# EAGLE board CT_Adapter_MOD4ELECROW (EAGLE 6.5.0)
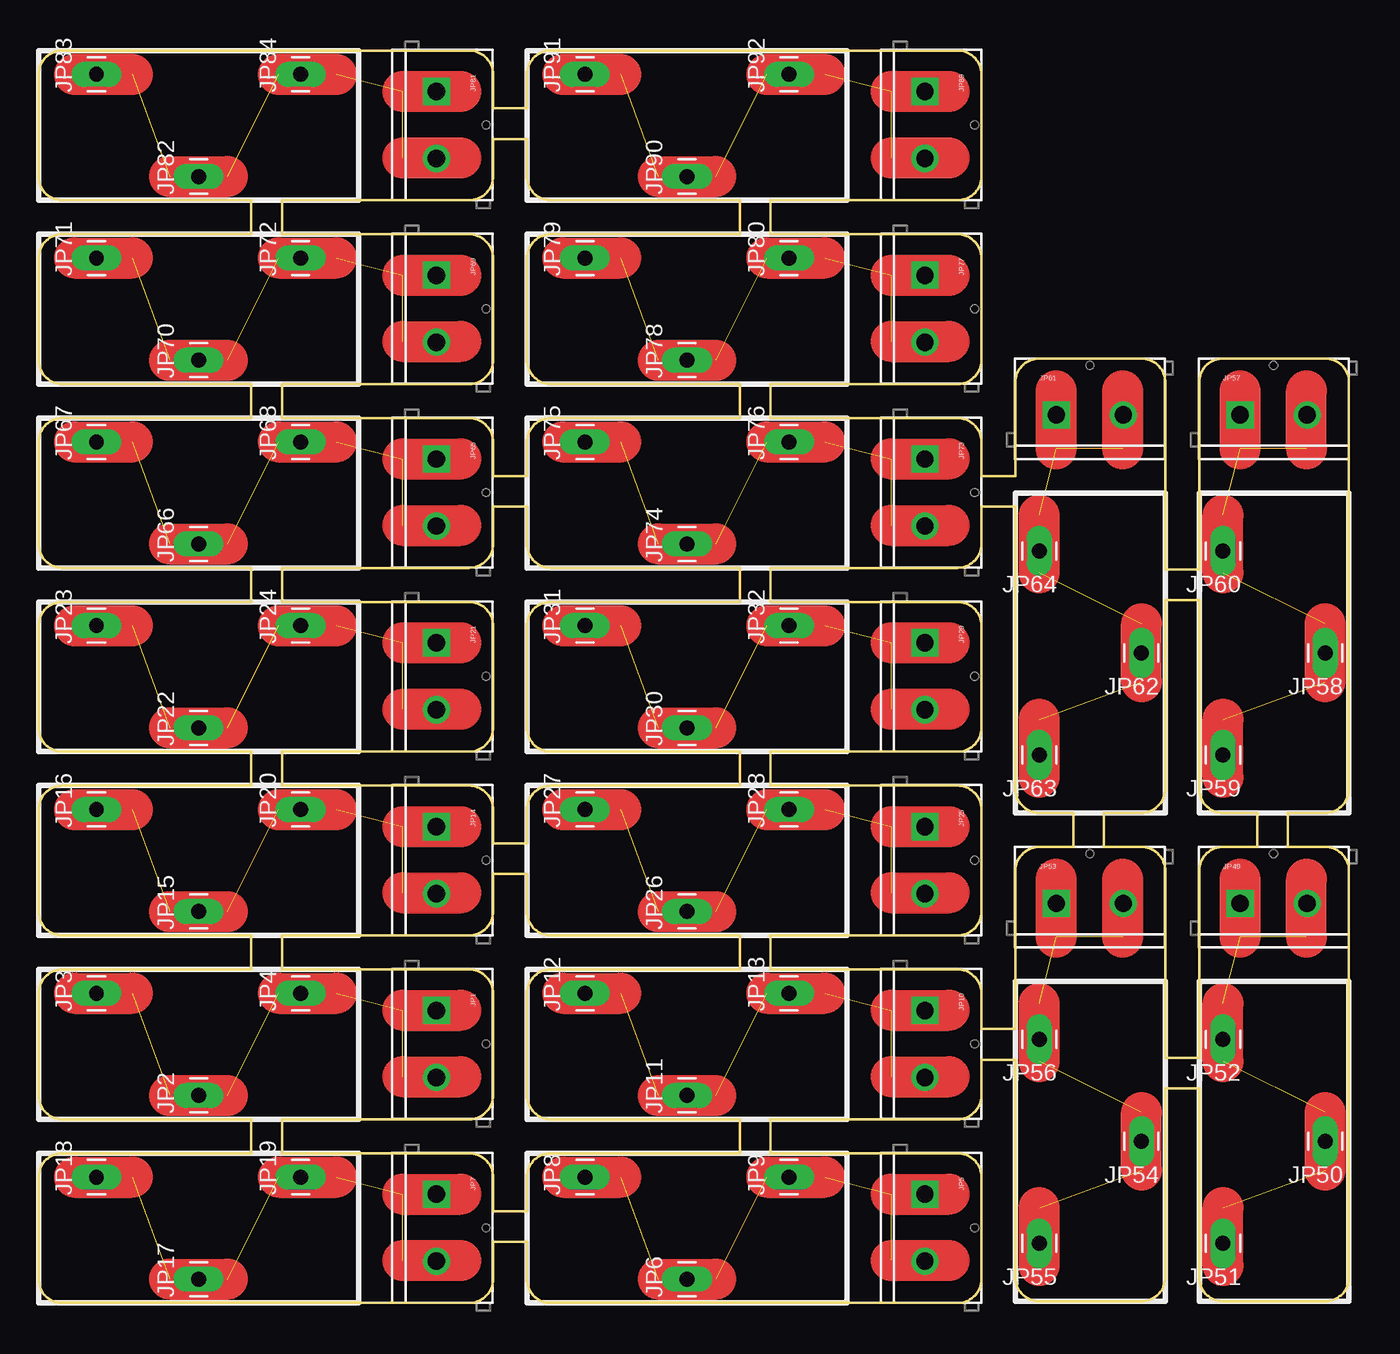
[diagram p0: board, top side]
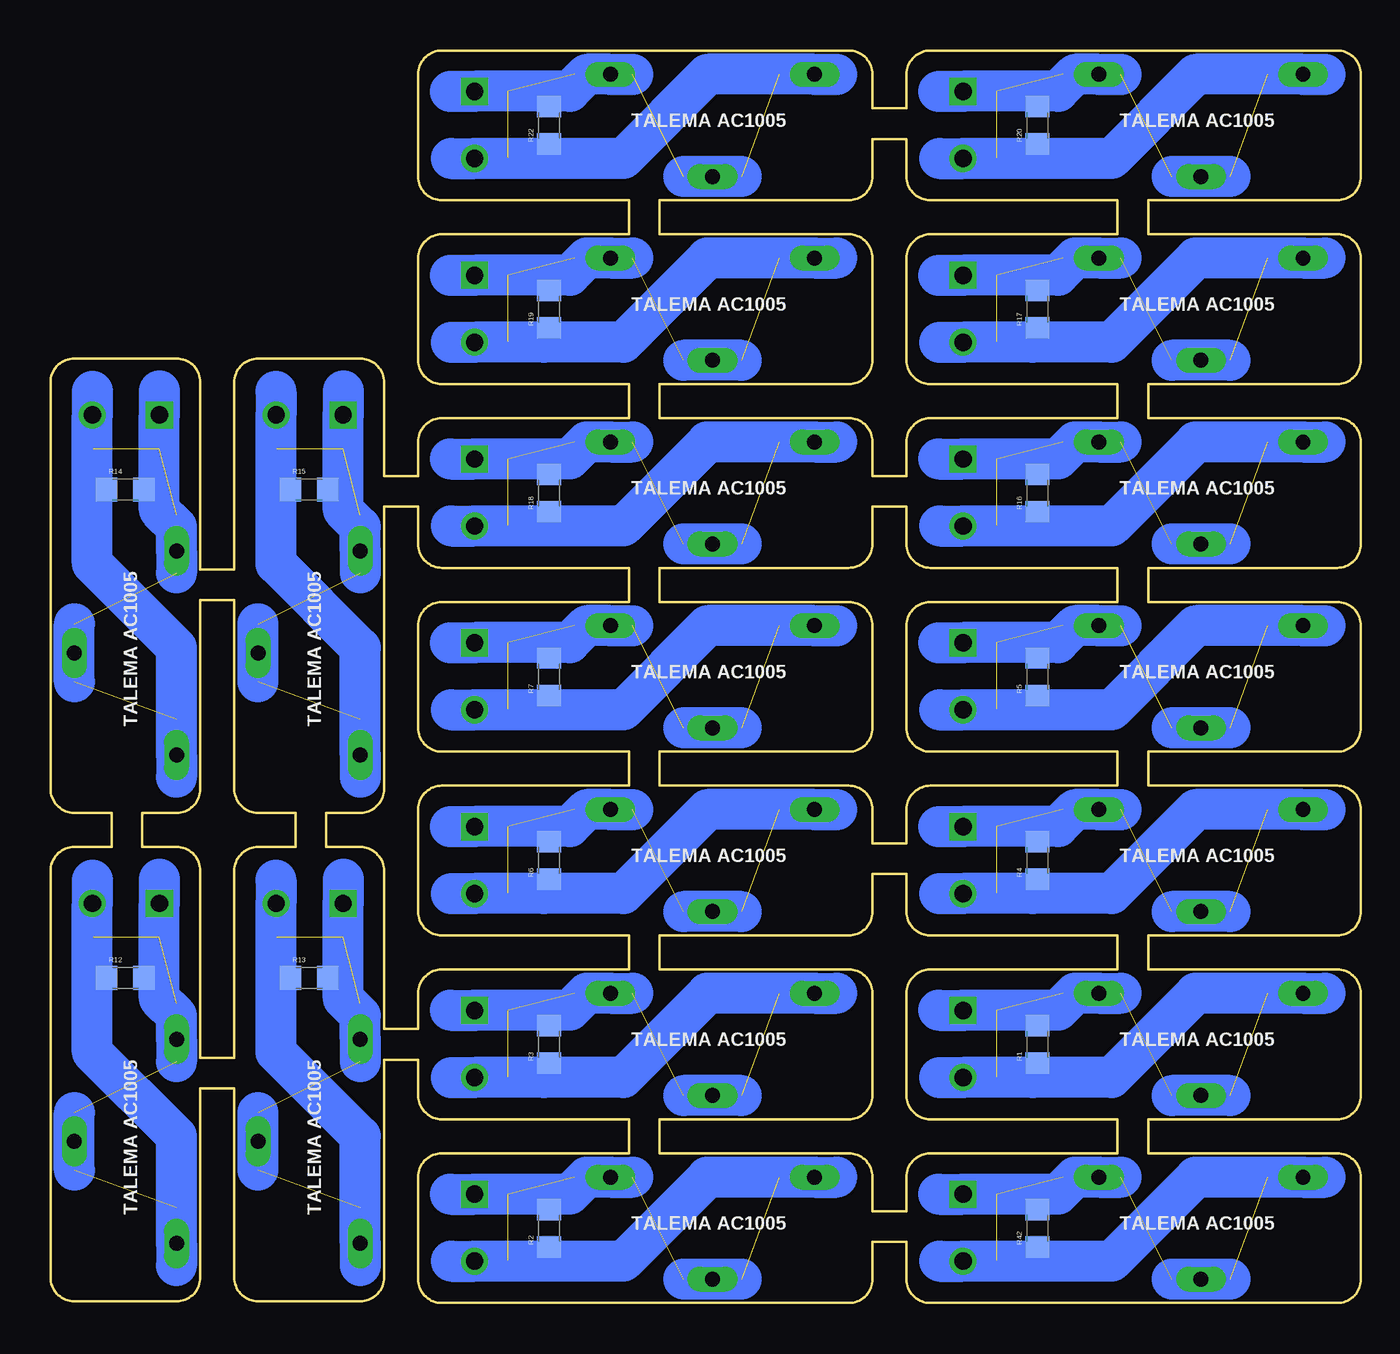
[diagram p1: board, bottom side, seen from below]

Size 97.79 x 93.47 mm. Coordinates in mm from the lower left corner, seen from the top.
Outline: 0,1.78 0,9.4 arc-90 1.78,11.18 15.88,11.18 15.88,13.72 1.78,13.72 arc-90 0,15.49 0,23.11 arc-90 1.78,24.89 15.88,24.89 15.88,27.43 1.78,27.43 arc-90 0,29.21 0,36.83 arc-90 1.78,38.61 15.88,38.61 15.88,41.15 1.78,41.15 arc-90 0,42.93 0,50.55 arc-90 1.78,52.32 15.88,52.32 15.88,54.86 1.78,54.86 arc-90 0,56.64 0,64.26 arc-90 1.78,66.04 15.88,66.04 15.88,68.58 1.78,68.58 arc-90 0,70.36 0,77.98 arc-90 1.78,79.76 15.88,79.76 15.88,82.3 1.78,82.3 arc-90 0,84.07 0,91.69 arc-90 1.78,93.47 32.13,93.47 arc-90 33.91,91.69 33.91,89.15 36.45,89.15 36.45,91.69 arc-90 38.23,93.47 68.58,93.47 arc-90 70.36,91.69 70.36,84.07 arc-90 68.58,82.3 54.61,82.3 54.61,79.76 68.58,79.76 arc-90 70.36,77.98 70.36,70.36 arc-90 68.58,68.58 54.61,68.58 54.61,66.04 68.58,66.04 arc-90 70.36,64.26 70.36,61.72 72.9,61.72 72.9,68.71 arc-90 74.68,70.48 82.3,70.48 arc-90 84.07,68.71 84.07,54.74 86.61,54.74 86.61,68.71 arc-90 88.39,70.48 96.01,70.48 arc-90 97.79,68.71 97.79,38.35 arc-90 96.01,36.58 93.22,36.58 93.22,34.04 96.01,34.04 arc-90 97.79,32.26 97.79,1.91 arc-90 96.01,0.13 88.39,0.13 arc-90 86.61,1.91 86.61,16 84.07,16 84.07,1.91 arc-90 82.3,0.13 74.68,0.13 arc-90 72.9,1.91 72.9,18.16 70.36,18.16 70.36,15.49 arc-90 68.58,13.72 54.61,13.72 54.61,11.18 68.58,11.18 arc-90 70.36,9.4 70.36,1.78 arc-90 68.58,0 38.23,0 arc-90 36.45,1.78 36.45,4.57 33.91,4.57 33.91,1.78 arc-90 32.13,0 1.78,0 arc-90 0,1.78
Outline: 33.91,9.4 33.91,6.86 36.45,6.86 36.45,9.4 arc-90 38.23,11.18 52.32,11.18 52.32,13.72 38.23,13.72 arc-90 36.45,15.49 36.45,23.11 arc-90 38.23,24.89 52.32,24.89 52.32,27.43 38.23,27.43 arc-90 36.45,29.21 36.45,32 33.91,32 33.91,29.21 arc-90 32.13,27.43 18.16,27.43 18.16,24.89 32.13,24.89 arc-90 33.91,23.11 33.91,15.49 arc-90 32.13,13.72 18.16,13.72 18.16,11.18 32.13,11.18 arc-90 33.91,9.4
Outline: 70.36,23.11 70.36,20.45 72.9,20.45 72.9,32.26 arc-90 74.68,34.04 77.22,34.04 77.22,36.58 74.68,36.58 arc-90 72.9,38.35 72.9,59.44 70.36,59.44 70.36,56.64 arc-90 68.58,54.86 54.61,54.86 54.61,52.32 68.58,52.32 arc-90 70.36,50.55 70.36,42.93 arc-90 68.58,41.15 54.61,41.15 54.61,38.61 68.58,38.61 arc-90 70.36,36.83 70.36,29.21 arc-90 68.58,27.43 54.61,27.43 54.61,24.89 68.58,24.89 arc-90 70.36,23.11
Outline: 33.91,36.83 33.91,34.29 36.45,34.29 36.45,36.83 arc-90 38.23,38.61 52.32,38.61 52.32,41.15 38.23,41.15 arc-90 36.45,42.93 36.45,50.55 arc-90 38.23,52.32 52.32,52.32 52.32,54.86 38.23,54.86 arc-90 36.45,56.64 36.45,59.44 33.91,59.44 33.91,56.64 arc-90 32.13,54.86 18.16,54.86 18.16,52.32 32.13,52.32 arc-90 33.91,50.55 33.91,42.93 arc-90 32.13,41.15 18.16,41.15 18.16,38.61 32.13,38.61 arc-90 33.91,36.83
Outline: 88.39,34.04 90.93,34.04 90.93,36.58 88.39,36.58 arc-90 86.61,38.35 86.61,52.45 84.07,52.45 84.07,38.35 arc-90 82.3,36.58 79.5,36.58 79.5,34.04 82.3,34.04 arc-90 84.07,32.26 84.07,18.29 86.61,18.29 86.61,32.26 arc-90 88.39,34.04
Outline: 33.91,64.26 33.91,61.72 36.45,61.72 36.45,64.26 arc-90 38.23,66.04 52.32,66.04 52.32,68.58 38.23,68.58 arc-90 36.45,70.36 36.45,77.98 arc-90 38.23,79.76 52.32,79.76 52.32,82.3 38.23,82.3 arc-90 36.45,84.07 36.45,86.87 33.91,86.87 33.91,84.07 arc-90 32.13,82.3 18.16,82.3 18.16,79.76 32.13,79.76 arc-90 33.91,77.98 33.91,70.36 arc-90 32.13,68.58 18.16,68.58 18.16,66.04 32.13,66.04 arc-90 33.91,64.26
Copper layers (1*16): Top 0.035mm / dielectric 1.5mm / Bottom 0.035mm
Design rules "default *": minimum track width 10mil, minimum drill 24mil, track to track 8mil, track to pad 8mil, pad to pad 8mil, via to via 8mil, smd to smd 8mil, copper to edge 40mil, drill to drill 8mil, minimum pad ring 10mil, minimum via ring 8mil, stop-mask expansion 4mil, vias tented up to drill 0mil, thermal gap 10mil

## Footprints (pad centres in the part's own frame; a part is rotated, then mirrored left to right if it is on the bottom)
SCREWTERMINAL-5MM-2 = drill 1.3 pad 2.032 square: 1 0,0 | drill 1.3 pad 2.032: 2 5,0
1X01_LONGPAD = drill 1.118 pad 1.88 long: 1 0,0
1206 = smd 1.6 x 1.8: 1 -1.4,0; 2 1.4,0

## Placement (x,y rotation side)
JP1  [SCREWTERMINAL-5MM-2]  29.7,21.84 270 top
JP2  [1X01_LONGPAD]  11.94,15.49 90 top
JP3  [1X01_LONGPAD]  4.32,23.11 90 top
JP4  [1X01_LONGPAD]  19.56,23.11 90 top
JP5  [SCREWTERMINAL-5MM-2]  66.15,8.12 270 top
JP6  [1X01_LONGPAD]  48.39,1.78 90 top
JP7  [SCREWTERMINAL-5MM-2]  29.7,8.12 270 top
JP8  [1X01_LONGPAD]  40.77,9.4 90 top
JP9  [1X01_LONGPAD]  56.01,9.4 90 top
JP10  [SCREWTERMINAL-5MM-2]  66.15,21.84 270 top
JP11  [1X01_LONGPAD]  48.39,15.49 90 top
JP12  [1X01_LONGPAD]  40.77,23.11 90 top
JP13  [1X01_LONGPAD]  56.01,23.11 90 top
JP14  [SCREWTERMINAL-5MM-2]  29.7,35.55 270 top
JP15  [1X01_LONGPAD]  11.94,29.21 90 top
JP16  [1X01_LONGPAD]  4.32,36.83 90 top
JP17  [1X01_LONGPAD]  11.94,1.78 90 top
JP18  [1X01_LONGPAD]  4.32,9.4 90 top
JP19  [1X01_LONGPAD]  19.56,9.4 90 top
JP20  [1X01_LONGPAD]  19.56,36.83 90 top
JP21  [SCREWTERMINAL-5MM-2]  29.7,49.27 270 top
JP22  [1X01_LONGPAD]  11.94,42.93 90 top
JP23  [1X01_LONGPAD]  4.32,50.55 90 top
JP24  [1X01_LONGPAD]  19.56,50.55 90 top
JP25  [SCREWTERMINAL-5MM-2]  66.15,35.55 270 top
JP26  [1X01_LONGPAD]  48.39,29.21 90 top
JP27  [1X01_LONGPAD]  40.77,36.83 90 top
JP28  [1X01_LONGPAD]  56.01,36.83 90 top
JP29  [SCREWTERMINAL-5MM-2]  66.15,49.27 270 top
JP30  [1X01_LONGPAD]  48.39,42.93 90 top
JP31  [1X01_LONGPAD]  40.77,50.55 90 top
JP32  [1X01_LONGPAD]  56.01,50.55 90 top
JP49  [SCREWTERMINAL-5MM-2]  89.67,29.82 0 top
JP50  [1X01_LONGPAD]  96.01,12.06 180 top
JP51  [1X01_LONGPAD]  88.39,4.45 180 top
JP52  [1X01_LONGPAD]  88.39,19.68 180 top
JP53  [SCREWTERMINAL-5MM-2]  75.95,29.82 0 top
JP54  [1X01_LONGPAD]  82.3,12.06 180 top
JP55  [1X01_LONGPAD]  74.68,4.45 180 top
JP56  [1X01_LONGPAD]  74.68,19.68 180 top
JP57  [SCREWTERMINAL-5MM-2]  89.67,66.27 0 top
JP58  [1X01_LONGPAD]  96.01,48.51 180 top
JP59  [1X01_LONGPAD]  88.39,40.89 180 top
JP60  [1X01_LONGPAD]  88.39,56.13 180 top
JP61  [SCREWTERMINAL-5MM-2]  75.95,66.27 0 top
JP62  [1X01_LONGPAD]  82.3,48.51 180 top
JP63  [1X01_LONGPAD]  74.68,40.89 180 top
JP64  [1X01_LONGPAD]  74.68,56.13 180 top
JP65  [SCREWTERMINAL-5MM-2]  29.7,62.98 270 top
JP66  [1X01_LONGPAD]  11.94,56.64 90 top
JP67  [1X01_LONGPAD]  4.32,64.26 90 top
JP68  [1X01_LONGPAD]  19.56,64.26 90 top
JP69  [SCREWTERMINAL-5MM-2]  29.7,76.7 270 top
JP70  [1X01_LONGPAD]  11.94,70.36 90 top
JP71  [1X01_LONGPAD]  4.32,77.98 90 top
JP72  [1X01_LONGPAD]  19.56,77.98 90 top
JP73  [SCREWTERMINAL-5MM-2]  66.15,62.98 270 top
JP74  [1X01_LONGPAD]  48.39,56.64 90 top
JP75  [1X01_LONGPAD]  40.77,64.26 90 top
JP76  [1X01_LONGPAD]  56.01,64.26 90 top
JP77  [SCREWTERMINAL-5MM-2]  66.15,76.7 270 top
JP78  [1X01_LONGPAD]  48.39,70.36 90 top
JP79  [1X01_LONGPAD]  40.77,77.98 90 top
JP80  [1X01_LONGPAD]  56.01,77.98 90 top
JP81  [SCREWTERMINAL-5MM-2]  29.7,90.42 270 top
JP82  [1X01_LONGPAD]  11.94,84.07 90 top
JP83  [1X01_LONGPAD]  4.32,91.69 90 top
JP84  [1X01_LONGPAD]  19.56,91.69 90 top
JP89  [SCREWTERMINAL-5MM-2]  66.15,90.42 270 top
JP90  [1X01_LONGPAD]  48.39,84.07 90 top
JP91  [1X01_LONGPAD]  40.77,91.69 90 top
JP92  [1X01_LONGPAD]  56.01,91.69 90 top
R1  50ohm  [1206]  24.13,19.3 90 bottom
R2  50ohm  [1206]  60.58,5.59 90 bottom
R3  50ohm  [1206]  60.58,19.3 90 bottom
R4  50ohm  [1206]  24.13,33.02 90 bottom
R5  50ohm  [1206]  24.13,46.74 90 bottom
R6  50ohm  [1206]  60.58,33.02 90 bottom
R7  50ohm  [1206]  60.58,46.74 90 bottom
R12  50ohm  [1206]  92.2,24.26 0 bottom
R13  50ohm  [1206]  78.49,24.26 0 bottom
R14  50ohm  [1206]  92.2,60.71 0 bottom
R15  50ohm  [1206]  78.49,60.71 0 bottom
R16  50ohm  [1206]  24.13,60.45 90 bottom
R17  50ohm  [1206]  24.13,74.17 90 bottom
R18  50ohm  [1206]  60.58,60.45 90 bottom
R19  50ohm  [1206]  60.58,74.17 90 bottom
R20  50ohm  [1206]  24.13,87.88 90 bottom
R22  50ohm  [1206]  60.58,87.88 90 bottom
R42  50ohm  [1206]  24.13,5.59 90 bottom

## Library data of the parts
JP1 JP5 JP7 JP10 JP14 JP21 JP25 JP29 JP49 JP53 JP57 JP61 JP65 JP69 JP73 JP77 JP81 JP89 = SparkFun-Connectors; STOREFRONT_ID: PRT-08432
JP2-JP4 JP6 JP8 JP9 JP11-JP13 JP15-JP20 JP22-JP24 JP26-JP28 JP30-JP32 JP50-JP52 JP54-JP56 JP58-JP60 JP62-JP64 JP66-JP68 JP70-JP72 JP74-JP76 JP78-JP80 JP82-JP84 JP90-JP92 = SparkFun-Connectors
R1-R7 R12-R20 R22 R42 = SparkFun-Passives

## Nets
AGND: JP7.1 JP19.1 R42.2
AGND1: JP1.1 JP4.1 R1.2
AGND2: JP5.1 JP9.1 R2.2
AGND3: JP10.1 JP13.1 R3.2
AGND4: JP14.1 JP20.1 R4.2
AGND5: JP21.1 JP24.1 R5.2
AGND6: JP25.1 JP28.1 R6.2
AGND7: JP29.1 JP32.1 R7.2
AGND12: JP49.1 JP52.1 R12.2
AGND13: JP53.1 JP56.1 R13.2
AGND14: JP57.1 JP60.1 R14.2
AGND15: JP61.1 JP64.1 R15.2
AGND16: JP65.1 JP68.1 R16.2
AGND17: JP69.1 JP72.1 R17.2
AGND18: JP73.1 JP76.1 R18.2
AGND19: JP77.1 JP80.1 R19.2
AGND20: JP81.1 JP84.1 R20.2
AGND22: JP89.1 JP92.1 R22.2
N$2: JP7.2 JP18.1 R42.1
N$3: JP1.2 JP3.1 R1.1
N$5: JP5.2 JP8.1 R2.1
N$7: JP10.2 JP12.1 R3.1
N$9: JP14.2 JP16.1 R4.1
N$11: JP21.2 JP23.1 R5.1
N$13: JP25.2 JP27.1 R6.1
N$15: JP29.2 JP31.1 R7.1
N$25: JP49.2 JP51.1 R12.1
N$27: JP53.2 JP55.1 R13.1
N$29: JP57.2 JP59.1 R14.1
N$31: JP61.2 JP63.1 R15.1
N$33: JP65.2 JP67.1 R16.1
N$35: JP69.2 JP71.1 R17.1
N$37: JP73.2 JP75.1 R18.1
N$39: JP77.2 JP79.1 R19.1
N$41: JP81.2 JP83.1 R20.1
N$45: JP89.2 JP91.1 R22.1

## Tracks (layer width: path | path; a pad name or v marks a point on that pad's centre or on a via)
AGND
  Bottom 0.356: 24.26,7.5 23.63,8.13 22.61,8.13
  Bottom 1.016: R42.2 24.26,7.5 25.53,8.76
  Bottom 3.048: 17.91,9.4 JP19.1 21.34,9.4 22.61,8.13 JP7.1 | 31.5,8.13 JP7.1 | JP7.1
AGND1
  Bottom 0.356: 24.26,21.21 23.63,21.84 22.61,21.84
  Bottom 1.016: R1.2 24.26,21.21 25.53,22.48
  Bottom 3.048: 17.91,23.11 JP4.1 21.34,23.11 22.61,21.84 JP1.1 | 31.5,21.84 JP1.1 | JP1.1
AGND2
  Bottom 0.356: 60.71,7.5 60.08,8.13 59.05,8.13
  Bottom 1.016: R2.2 60.71,7.5 61.98,8.76
  Bottom 3.048: 54.36,9.4 JP9.1 57.78,9.4 59.05,8.13 JP5.1 | 67.94,8.13 JP5.1 | JP5.1
AGND3
  Bottom 0.356: 60.71,21.21 60.08,21.84 59.05,21.84
  Bottom 1.016: R3.2 60.71,21.21 61.98,22.48
  Bottom 3.048: 54.36,23.11 JP13.1 57.78,23.11 59.05,21.84 JP10.1 | 67.94,21.84 JP10.1 | JP10.1
AGND4
  Bottom 0.356: 24.26,34.93 23.63,35.56 22.61,35.56
  Bottom 1.016: R4.2 24.26,34.93 25.53,36.2
  Bottom 3.048: 17.91,36.83 JP20.1 21.34,36.83 22.61,35.56 JP14.1 | 31.5,35.56 JP14.1 | JP14.1
AGND5
  Bottom 0.356: 24.26,48.64 23.63,49.28 22.61,49.28
  Bottom 1.016: R5.2 24.26,48.64 25.53,49.91
  Bottom 3.048: 17.91,50.55 JP24.1 21.34,50.55 22.61,49.28 JP21.1 | 31.5,49.28 JP21.1 | JP21.1
AGND6
  Bottom 0.356: 60.71,34.93 60.08,35.56 59.05,35.56
  Bottom 1.016: R6.2 60.71,34.93 61.98,36.2
  Bottom 3.048: 54.36,36.83 JP28.1 57.78,36.83 59.05,35.56 JP25.1 | 67.94,35.56 JP25.1 | JP25.1
AGND7
  Bottom 0.356: 60.71,48.64 60.08,49.28 59.05,49.28
  Bottom 1.016: R7.2 60.71,48.64 61.98,49.91
  Bottom 3.048: 54.36,50.55 JP32.1 57.78,50.55 59.05,49.28 JP29.1 | 67.94,49.28 JP29.1 | JP29.1
AGND12
  Bottom 0.356: 90.29,24.39 89.66,23.75 89.66,22.73
  Bottom 1.016: R12.2 90.29,24.39 89.03,25.65
  Bottom 3.048: 88.39,18.03 JP52.1 88.39,21.46 89.66,22.73 JP49.1 | 89.66,31.62 JP49.1 | JP49.1
AGND13
  Bottom 0.356: 76.58,24.39 75.95,23.75 75.95,22.73
  Bottom 1.016: R13.2 76.58,24.39 75.31,25.65
  Bottom 3.048: 74.68,18.03 JP56.1 74.68,21.46 75.95,22.73 JP53.1 | 75.95,31.62 JP53.1 | JP53.1
AGND14
  Bottom 0.356: 90.29,60.84 89.66,60.2 89.66,59.18
  Bottom 1.016: R14.2 90.29,60.84 89.03,62.1
  Bottom 3.048: 88.39,54.48 JP60.1 88.39,57.91 89.66,59.18 JP57.1 | 89.66,68.07 JP57.1 | JP57.1
AGND15
  Bottom 0.356: 76.58,60.84 75.95,60.2 75.95,59.18
  Bottom 1.016: R15.2 76.58,60.84 75.31,62.1
  Bottom 3.048: 74.68,54.48 JP64.1 74.68,57.91 75.95,59.18 JP61.1 | 75.95,68.07 JP61.1 | JP61.1
AGND16
  Bottom 0.356: 24.26,62.36 23.63,62.99 22.61,62.99
  Bottom 1.016: R16.2 24.26,62.36 25.53,63.63
  Bottom 3.048: 17.91,64.26 JP68.1 21.34,64.26 22.61,62.99 29.7,62.99 | 31.5,62.99 29.7,62.99 | 29.7,62.99 JP65.1
AGND17
  Bottom 0.356: 24.26,76.08 23.63,76.71 22.61,76.71
  Bottom 1.016: R17.2 24.26,76.08 25.53,77.34
  Bottom 3.048: 17.91,77.98 JP72.1 21.34,77.98 22.61,76.71 JP69.1 | 31.5,76.71 JP69.1 | JP69.1
AGND18
  Bottom 0.356: 60.71,62.36 60.08,62.99 59.05,62.99
  Bottom 1.016: R18.2 60.71,62.36 61.98,63.63
  Bottom 3.048: 54.36,64.26 JP76.1 57.78,64.26 59.05,62.99 66.15,62.99 | 67.94,62.99 66.15,62.99 | 66.15,62.99 JP73.1
AGND19
  Bottom 0.356: 60.71,76.08 60.08,76.71 59.05,76.71
  Bottom 1.016: R19.2 60.71,76.08 61.98,77.34
  Bottom 3.048: 54.36,77.98 JP80.1 57.78,77.98 59.05,76.71 JP77.1 | 67.94,76.71 JP77.1 | JP77.1
AGND20
  Bottom 0.356: 24.26,89.79 23.63,90.42 22.61,90.42
  Bottom 1.016: R20.2 24.26,89.79 25.53,91.06
  Bottom 3.048: 17.91,91.69 JP84.1 21.34,91.69 22.61,90.42 JP81.1 | 31.5,90.42 JP81.1 | JP81.1
AGND22
  Bottom 0.356: 60.71,89.79 60.08,90.42 59.05,90.42
  Bottom 1.016: R22.2 60.71,89.79 61.98,91.06
  Bottom 3.048: 54.36,91.69 JP92.1 57.78,91.69 59.05,90.42 JP89.1 | 67.94,90.42 JP89.1 | JP89.1
N$1  (5 unrouted)
  Top 3.048: 27.18,3.17 31.5,3.17 | 2.67,9.4 6.99,9.4 | 9.78,1.78 14.1,1.78 | 17.91,9.4 22.23,9.4 | 27.18,8.13 31.5,8.13
  Bottom 3.048: 9.78,1.78 14.1,1.78
N$2
  Bottom 1.016: R42.1 24.13,3.5 24.51,3.12
  Bottom 3.048: 2.67,9.4 JP18.1 12.32,9.4 18.6,3.12 24.51,3.12 JP7.2 31.44,3.12
N$3
  Bottom 1.016: R1.1 24.13,17.22 24.51,16.84
  Bottom 3.048: 2.67,23.11 JP3.1 12.32,23.11 18.6,16.84 24.51,16.84 JP1.2 31.44,16.84
N$4  (5 unrouted)
  Top 3.048: 27.18,16.89 31.5,16.89 | 2.67,23.11 6.99,23.11 | 9.78,15.49 14.1,15.49 | 17.91,23.11 22.23,23.11 | 27.18,21.84 31.5,21.84
  Bottom 3.048: 9.78,15.49 14.1,15.49
N$5
  Bottom 1.016: R2.1 60.58,3.5 60.96,3.12
  Bottom 3.048: 39.12,9.4 JP8.1 48.77,9.4 55.05,3.12 60.96,3.12 JP5.2 67.89,3.12
N$6  (5 unrouted)
  Top 3.048: 63.63,3.17 67.94,3.17 | 39.12,9.4 43.43,9.4 | 46.23,1.78 50.55,1.78 | 54.36,9.4 58.67,9.4 | 63.63,8.13 67.94,8.13
  Bottom 3.048: 46.23,1.78 50.55,1.78
N$7
  Bottom 1.016: R3.1 60.58,17.22 60.96,16.84
  Bottom 3.048: 39.12,23.11 JP12.1 48.77,23.11 55.05,16.84 60.96,16.84 JP10.2 67.89,16.84
N$8  (5 unrouted)
  Top 3.048: 63.63,16.89 67.94,16.89 | 39.12,23.11 43.43,23.11 | 46.23,15.49 50.55,15.49 | 54.36,23.11 58.67,23.11 | 63.63,21.84 67.94,21.84
  Bottom 3.048: 46.23,15.49 50.55,15.49
N$9
  Bottom 1.016: R4.1 24.13,30.93 24.51,30.55
  Bottom 3.048: 2.67,36.83 JP16.1 12.32,36.83 18.6,30.55 24.51,30.55 JP14.2 31.44,30.55
N$10  (5 unrouted)
  Top 3.048: 27.18,30.61 31.5,30.61 | 2.67,36.83 6.99,36.83 | 9.78,29.21 14.1,29.21 | 17.91,36.83 22.23,36.83 | 27.18,35.56 31.5,35.56
  Bottom 3.048: 9.78,29.21 14.1,29.21
N$11
  Bottom 1.016: R5.1 24.13,44.65 24.51,44.27
  Bottom 3.048: 2.67,50.55 JP23.1 12.32,50.55 18.6,44.27 24.51,44.27 JP21.2 31.44,44.27
N$12  (5 unrouted)
  Top 3.048: 27.18,44.32 31.5,44.32 | 2.67,50.55 6.99,50.55 | 9.78,42.93 14.1,42.93 | 17.91,50.55 22.23,50.55 | 27.18,49.28 31.5,49.28
  Bottom 3.048: 9.78,42.93 14.1,42.93
N$13
  Bottom 1.016: R6.1 60.58,30.93 60.96,30.55
  Bottom 3.048: 39.12,36.83 JP27.1 48.77,36.83 55.05,30.55 60.96,30.55 JP25.2 67.89,30.55
N$14  (5 unrouted)
  Top 3.048: 63.63,30.61 67.94,30.61 | 39.12,36.83 43.43,36.83 | 46.23,29.21 50.55,29.21 | 54.36,36.83 58.67,36.83 | 63.63,35.56 67.94,35.56
  Bottom 3.048: 46.23,29.21 50.55,29.21
N$15
  Bottom 1.016: R7.1 60.58,44.65 60.96,44.27
  Bottom 3.048: 39.12,50.55 JP31.1 48.77,50.55 55.05,44.27 60.96,44.27 JP29.2 67.89,44.27
N$16  (5 unrouted)
  Top 3.048: 63.63,44.32 67.94,44.32 | 39.12,50.55 43.43,50.55 | 46.23,42.93 50.55,42.93 | 54.36,50.55 58.67,50.55 | 63.63,49.28 67.94,49.28
  Bottom 3.048: 46.23,42.93 50.55,42.93
N$25
  Bottom 1.016: R12.1 94.29,24.26 94.67,24.64
  Bottom 3.048: 88.39,2.79 JP51.1 88.39,12.45 94.67,18.72 94.67,24.64 JP49.2 94.67,31.57
N$26  (5 unrouted)
  Top 3.048: 94.61,27.3 94.61,31.62 | 88.39,2.79 88.39,7.11 | 96.01,9.91 96.01,14.22 | 88.39,18.03 88.39,22.35 | 89.66,27.3 89.66,31.62
  Bottom 3.048: 96.01,9.91 96.01,14.22
N$27
  Bottom 1.016: R13.1 80.57,24.26 80.95,24.64
  Bottom 3.048: 74.68,2.79 JP55.1 74.68,12.45 80.95,18.72 80.95,24.64 JP53.2 80.95,31.57
N$28  (5 unrouted)
  Top 3.048: 80.9,27.3 80.9,31.62 | 74.68,2.79 74.68,7.11 | 82.3,9.91 82.3,14.22 | 74.68,18.03 74.68,22.35 | 75.95,27.3 75.95,31.62
  Bottom 3.048: 82.3,9.91 82.3,14.22
N$29
  Bottom 1.016: R14.1 94.29,60.71 94.67,61.09
  Bottom 3.048: 88.39,39.24 JP59.1 88.39,48.9 94.67,55.17 94.67,61.09 JP57.2 94.67,68.02
N$30  (5 unrouted)
  Top 3.048: 94.61,63.75 94.61,68.07 | 88.39,39.24 88.39,43.56 | 96.01,46.35 96.01,50.67 | 88.39,54.48 88.39,58.8 | 89.66,63.75 89.66,68.07
  Bottom 3.048: 96.01,46.35 96.01,50.67
N$31
  Bottom 1.016: R15.1 80.57,60.71 80.95,61.09
  Bottom 3.048: 74.68,39.24 JP63.1 74.68,48.9 80.95,55.17 80.95,61.09 JP61.2 80.95,68.02
N$32  (5 unrouted)
  Top 3.048: 80.9,63.75 80.9,68.07 | 74.68,39.24 74.68,43.56 | 82.3,46.35 82.3,50.67 | 74.68,54.48 74.68,58.8 | 75.95,63.75 75.95,68.07
  Bottom 3.048: 82.3,46.35 82.3,50.67
N$33
  Bottom 1.016: R16.1 24.13,58.37 24.51,57.98
  Bottom 3.048: 2.67,64.26 JP67.1 12.32,64.26 18.6,57.98 24.51,57.98 JP65.2 31.44,57.98
N$34  (5 unrouted)
  Top 3.048: 27.18,58.04 31.5,58.04 | 2.67,64.26 6.99,64.26 | 9.78,56.64 14.1,56.64 | 17.91,64.26 22.23,64.26 | 27.18,62.99 31.5,62.99
  Bottom 3.048: 9.78,56.64 14.1,56.64
N$35
  Bottom 1.016: R17.1 24.13,72.08 24.51,71.7
  Bottom 3.048: 2.67,77.98 JP71.1 12.32,77.98 18.6,71.7 24.51,71.7 JP69.2 31.44,71.7
N$36  (5 unrouted)
  Top 3.048: 27.18,71.75 31.5,71.75 | 2.67,77.98 6.99,77.98 | 9.78,70.36 14.1,70.36 | 17.91,77.98 22.23,77.98 | 27.18,76.71 31.5,76.71
  Bottom 3.048: 9.78,70.36 14.1,70.36
N$37
  Bottom 1.016: R18.1 60.58,58.37 60.96,57.98
  Bottom 3.048: 39.12,64.26 JP75.1 48.77,64.26 55.05,57.98 60.96,57.98 JP73.2 67.89,57.98
N$38  (5 unrouted)
  Top 3.048: 63.63,58.04 67.94,58.04 | 39.12,64.26 43.43,64.26 | 46.23,56.64 50.55,56.64 | 54.36,64.26 58.67,64.26 | 63.63,62.99 67.94,62.99
  Bottom 3.048: 46.23,56.64 50.55,56.64
N$39
  Bottom 1.016: R19.1 60.58,72.08 60.96,71.7
  Bottom 3.048: 39.12,77.98 JP79.1 48.77,77.98 55.05,71.7 60.96,71.7 JP77.2 67.89,71.7
N$40  (5 unrouted)
  Top 3.048: 63.63,71.75 67.94,71.75 | 39.12,77.98 43.43,77.98 | 46.23,70.36 50.55,70.36 | 54.36,77.98 58.67,77.98 | 63.63,76.71 67.94,76.71
  Bottom 3.048: 46.23,70.36 50.55,70.36
N$41
  Bottom 1.016: R20.1 24.13,85.8 24.51,85.42
  Bottom 3.048: 2.67,91.69 JP83.1 12.32,91.69 18.6,85.42 24.51,85.42 JP81.2 31.44,85.42
N$42  (5 unrouted)
  Top 3.048: 27.18,85.47 31.5,85.47 | 2.67,91.69 6.99,91.69 | 9.78,84.07 14.1,84.07 | 17.91,91.69 22.23,91.69 | 27.18,90.42 31.5,90.42
  Bottom 3.048: 9.78,84.07 14.1,84.07
N$45
  Bottom 1.016: R22.1 60.58,85.8 60.96,85.42
  Bottom 3.048: 39.12,91.69 JP91.1 48.77,91.69 55.05,85.42 60.96,85.42 JP89.2 67.89,85.42
N$46  (5 unrouted)
  Top 3.048: 63.63,85.47 67.94,85.47 | 39.12,91.69 43.43,91.69 | 46.23,84.07 50.55,84.07 | 54.36,91.69 58.67,91.69 | 63.63,90.42 67.94,90.42
  Bottom 3.048: 46.23,84.07 50.55,84.07

## Text on the board
bPlace: TALEMA AC1005 | TALEMA AC1005 | TALEMA AC1005 | TALEMA AC1005 | TALEMA AC1005 | TALEMA AC1005 | TALEMA AC1005 | TALEMA AC1005 | TALEMA AC1005 | TALEMA AC1005 | TALEMA AC1005 | TALEMA AC1005 | TALEMA AC1005 | TALEMA AC1005 | TALEMA AC1005 | TALEMA AC1005 | TALEMA AC1005 | TALEMA AC1005